# Altium PCB PCB_Hackathon.PcbDoc
Units mm, origin at the board's own origin, x right, y up, seen from the top; angles counter-clockwise.
Board outline 30 x 41 mm, 2 copper layers (Top Layer, Bottom Layer); 33 components, 23 nets, 159 pads, 38 vias.
Unrouted connection lines stored in the file: 1.
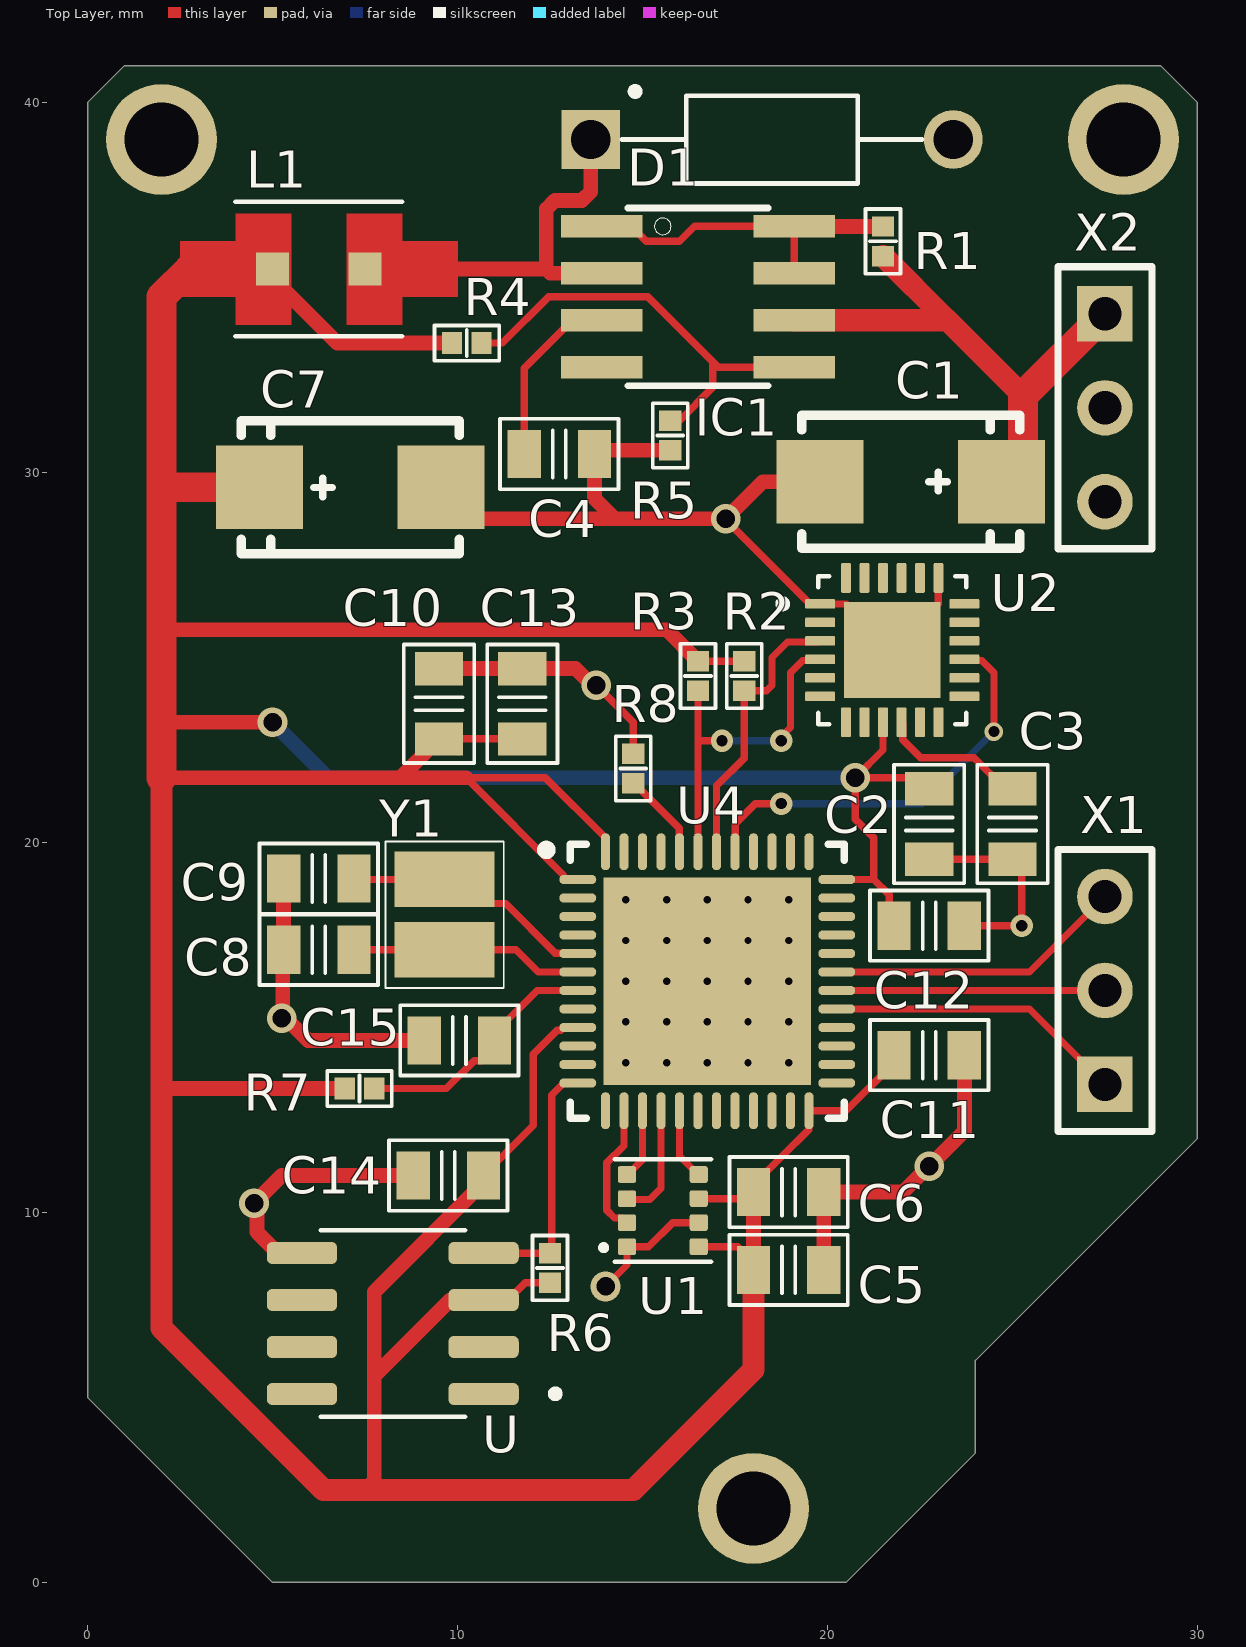
[diagram p0: Top Layer view]
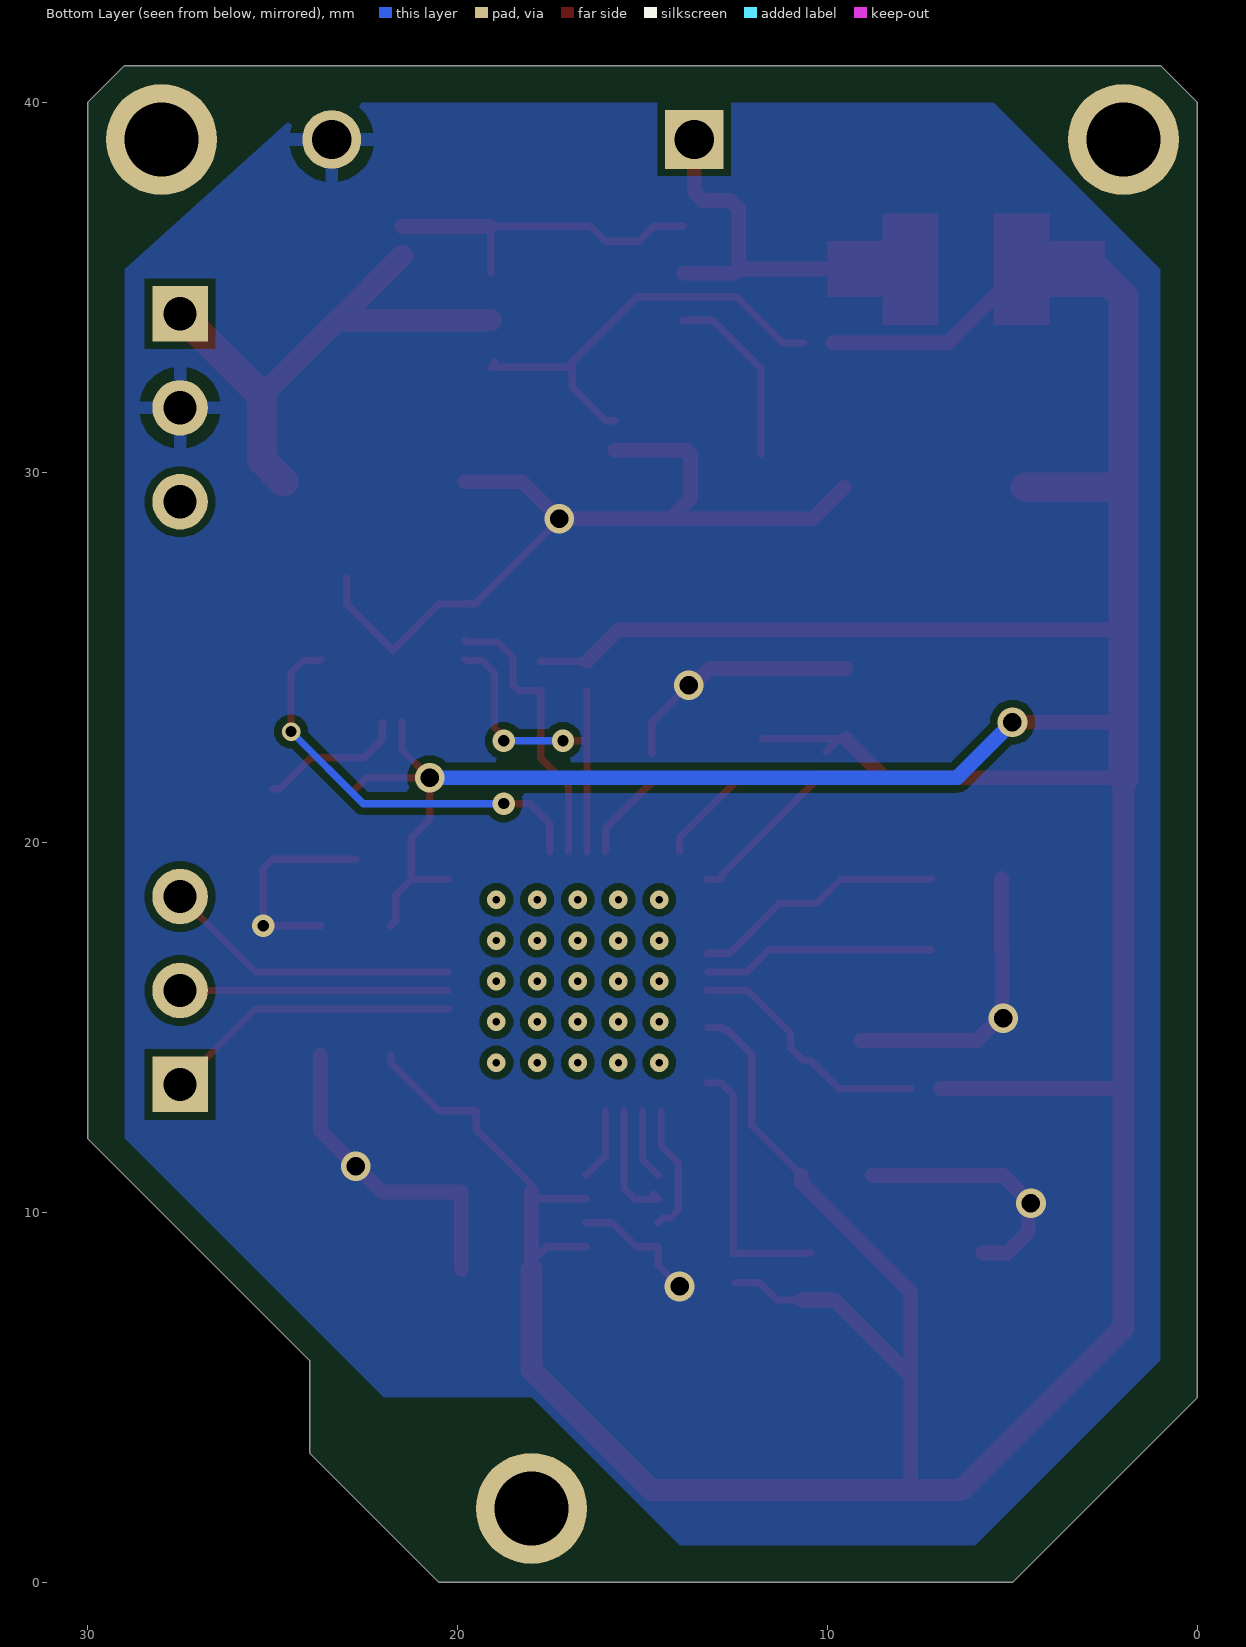
[diagram p1: Bottom Layer view, seen from below]

## Layer stack, top to bottom
Top Solder: solder mask 0.0102, Solder Resist, Dk 3.5
Top Layer: signal copper 0.0356
Dielectric 1: dielectric 0.32, FR-4, Dk 4.8
Bottom Layer: signal copper 0.0356
Bottom Solder: solder mask 0.0102, Solder Resist, Dk 3.5

## Board outline
5,0 0,5 0,40 1,41 29,41 30,40 30,12 24,6 24,3.5 20.5,0

## Design rules (kind name [scope] priority, off if disabled: settings)
AcuteAngle [All] p1: minimum=3.50000000000000E+0001 checktracksonly=FALSE
BoardOutlineClearance "BoardOutlineClearance 1" [All] p1: gap=0.25 ignorepadtopadclearanceinfootprint=FALSE except(0: Arc-SplitContinuation Track-SplitContinuation SMDPad-SplitContinuation THPad-SplitContinuation Via-SplitContinuation Fill-SplitContinuation Poly-SplitContinuation Region-SplitContinuation Text-SplitContinuation) // Milling
BoardOutlineClearance "BoardOutlineClearance 2" [All] p2: gap=0.4 ignorepadtopadclearanceinfootprint=FALSE except(0: Arc-SplitContinuation Track-SplitContinuation SMDPad-SplitContinuation THPad-SplitContinuation Via-SplitContinuation Fill-SplitContinuation Poly-SplitContinuation Region-SplitContinuation Text-SplitContinuation) // V-Cut
Clearance "Clearance 3 Oz" [All] p1 off: gap=0.35 ignorepadtopadclearanceinfootprint=FALSE except(0.25: Arc-Hole Track-Hole SMDPad-Hole THPad-Hole Via-Hole Fill-Hole Poly-Hole Region-Hole Text-Hole)
Clearance "Clearance 2 Oz" [All] p2 off: gap=0.3 ignorepadtopadclearanceinfootprint=FALSE except(0.25: Arc-Hole Track-Hole SMDPad-Hole THPad-Hole Via-Hole Fill-Hole Poly-Hole Region-Hole Text-Hole)
Clearance "Clearance-1 1 Oz" [All] p3: gap=0.2 ignorepadtopadclearanceinfootprint=FALSE except(0.25: Arc-Hole Track-Hole SMDPad-Hole THPad-Hole Via-Hole Fill-Hole Poly-Hole Region-Hole Text-Hole) // Standart
Clearance "Clearance-2 1 Oz" [All] p4 off: gap=0.15 ignorepadtopadclearanceinfootprint=FALSE except(0.2: Arc-Fill Arc-Poly Track-Fill Track-Poly SMDPad-Fill SMDPad-Poly THPad-Fill THPad-Poly Via-Fill Via-Poly Fill-Fill Fill-Poly Poly-Poly; 0.25: Arc-Hole Track-Hole SMDPad-Hole THPad-Hole Via-Hole Fill-Hole Poly-Hole Region-Hole Text-Hole) // Advance
Clearance "Clearance-1 1/2 Oz" [All] p5 off: gap=0.125 ignorepadtopadclearanceinfootprint=FALSE except(0.2: Arc-Fill Arc-Poly Track-Fill Track-Poly SMDPad-SMDPad SMDPad-Fill SMDPad-Poly THPad-Fill THPad-Poly Via-Fill Via-Poly Fill-Fill Fill-Poly Poly-Poly Poly-Region Poly-Text; 0.25: Arc-Hole Track-Hole SMDPad-Hole THPad-Hole Via-Hole Fill-Hole Poly-Hole Region-Hole Text-Hole) // Standart
Clearance "Clearance-2 1/2 Oz" [All] p6 off: gap=0.1 ignorepadtopadclearanceinfootprint=FALSE except(0.15: Arc-Fill Arc-Poly Track-Fill Track-Poly SMDPad-SMDPad SMDPad-Fill SMDPad-Poly THPad-Fill THPad-Poly Via-Fill Via-Poly Fill-Fill Fill-Poly Poly-Poly Poly-Region Poly-Text; 0.25: Arc-Hole Track-Hole SMDPad-Hole THPad-Hole Via-Hole Fill-Hole Poly-Hole Region-Hole Text-Hole) // Advance
DiffPairsRouting "DiffPairsRouting 1 Oz" [All] p1: maxlimit=0.254 minlimit=0.2 mostfreqgap=0.254 toplayer_minwidth=0.2 toplayer_maxwidth=0.381 toplayer_prefwidth=0.381 bottomlayer_minwidth=0.2 bottomlayer_maxwidth=0.381 bottomlayer_prefwidth=0.381 maxuncoupledlength=12.7
DiffPairsRouting "DiffPairsRouting 1/2 Oz" [All] p2: maxlimit=0.254 minlimit=0.1 mostfreqgap=0.254 toplayer_minwidth=0.1 toplayer_maxwidth=0.381 toplayer_prefwidth=0.381 bottomlayer_minwidth=0.1 bottomlayer_maxwidth=0.381 bottomlayer_prefwidth=0.381 maxuncoupledlength=12.7
HoleSize "Minimum HoleSize" [IsPad] p1: absolutevalues=TRUE maxlimit=5.9 minlimit=0.6 maxpercent=80.000 minpercent=20.000
HoleSize "Minimum HoleSize VIA 1" [IsVia] p2: absolutevalues=TRUE maxlimit=5.9 minlimit=0.3 maxpercent=80.000 minpercent=20.000 // Standart
HoleSize "Minimum HoleSize VIA 2" [IsVia] p3: absolutevalues=TRUE maxlimit=5.9 minlimit=0.2 maxpercent=80.000 minpercent=20.000 // Advance
HoleToHoleClearance Hole2HoleClearance [All] p1: gap=0.25 allowstackedmicrovias=FALSE
MinimumAnnularRing "Minimum AR VIA Standart" [IsVia] p1: minimumring=0.15
MinimumAnnularRing "Minimum AR PAD Standart" [IsPAD] p2: minimumring=0.2
MinimumAnnularRing "Minimum AR VIA Advance" [IsVia] p3: minimumring=0.1
MinimumAnnularRing "Minimum AR PAD Advance" [IsPAD] p4: minimumring=0.15
MinimumSolderMaskSliver "SolderMask Bridge Standart" [All] p1: minsoldermaskwidth=0.15 // All Masks
MinimumSolderMaskSliver "SolderMask Bridge Advance" [All] p2: minsoldermaskwidth=0.1 // Mask LDI
PlaneClearance "PlaneClearance 3 Oz" [All] p1: clearance=0.35
PlaneClearance "PlaneClearance 2 Oz" [All] p2: clearance=0.3
PlaneClearance "PlaneClearance 1 Oz" [All] p3: clearance=0.2
PlaneClearance "PlaneClearance-1 1/2 Oz" [All] p4: clearance=0.2 // Standart
PlaneClearance "PlaneClearance-2 1/2 Oz" [All] p5: clearance=0.15 // Advance
PlaneConnect "TermalConnect 3 Oz" [All] p1: planeconnectstyle=Relief reliefexpansion=0.2 reliefentries=4 reliefconductorwidth=0.35 reliefairgap=0.35 // Standart
PlaneConnect "TermalConnect 2 Oz" [All] p2: planeconnectstyle=Relief reliefexpansion=0.2 reliefentries=4 reliefconductorwidth=0.3 reliefairgap=0.3 // Standart
PlaneConnect "TermalConnect-1 1 Oz" [All] p3: planeconnectstyle=Relief reliefexpansion=0.2 reliefentries=4 reliefconductorwidth=0.2 reliefairgap=0.2 // Standart
PlaneConnect "TermalConnect-2 1 Oz" [All] p4: pad.planeconnectstyle=Relief pad.reliefexpansion=0.15 pad.reliefentries=4 pad.reliefconductorwidth=0.2 pad.reliefairgap=0.2 via.planeconnectstyle=Direct via.reliefexpansion=0.15 via.reliefentries=4 via.reliefconductorwidth=0.15 via.reliefairgap=0.15 // Advance
PlaneConnect "TermalConnect-1 1/2 Oz" [All] p5: planeconnectstyle=Relief reliefexpansion=0.2 reliefentries=4 reliefconductorwidth=0.2 reliefairgap=0.2 // Standart
PlaneConnect "TermalConnect-2 1/2 Oz" [All] p6: pad.planeconnectstyle=Relief pad.reliefexpansion=0.15 pad.reliefentries=4 pad.reliefconductorwidth=0.15 pad.reliefairgap=0.15 via.planeconnectstyle=Direct via.reliefexpansion=0.15 via.reliefentries=4 via.reliefconductorwidth=0.15 via.reliefairgap=0.15 // Advance
PolygonConnect "PolygonConnect 3 Oz" [All] p1: thpad.connectstyle=Relief thpad.reliefconductorwidth=0.35 thpad.reliefentries=4 thpad.polygonreliefangle="90 Angle" thpad.airgapwidth=0.35 smdpad.connectstyle=Relief smdpad.reliefconductorwidth=0.35 smdpad.reliefentries=4 smdpad.polygonreliefangle="90 Angle" smdpad.airgapwidth=0.35 via.connectstyle=Direct via.reliefconductorwidth=0.254 via.reliefentries=4 via.polygonreliefangle="90 Angle" via.airgapwidth=0.254
PolygonConnect "PolygonConnect 2 Oz" [All] p2: thpad.connectstyle=Relief thpad.reliefconductorwidth=0.3 thpad.reliefentries=4 thpad.polygonreliefangle="90 Angle" thpad.airgapwidth=0.3 smdpad.connectstyle=Relief smdpad.reliefconductorwidth=0.3 smdpad.reliefentries=4 smdpad.polygonreliefangle="90 Angle" smdpad.airgapwidth=0.3 via.connectstyle=Direct via.reliefconductorwidth=0.254 via.reliefentries=4 via.polygonreliefangle="90 Angle" via.airgapwidth=0.254
PolygonConnect "PolygonConnect-1 1 Oz" [All] p3: thpad.connectstyle=Relief thpad.reliefconductorwidth=0.2 thpad.reliefentries=4 thpad.polygonreliefangle="90 Angle" thpad.airgapwidth=0.2 smdpad.connectstyle=Relief smdpad.reliefconductorwidth=0.2 smdpad.reliefentries=4 smdpad.polygonreliefangle="90 Angle" smdpad.airgapwidth=0.2 via.connectstyle=Direct via.reliefconductorwidth=0.254 via.reliefentries=4 via.polygonreliefangle="90 Angle" via.airgapwidth=0.254 // Standart
PolygonConnect "PolygonConnect-2 1 Oz" [All] p4: thpad.connectstyle=Relief thpad.reliefconductorwidth=0.15 thpad.reliefentries=4 thpad.polygonreliefangle="90 Angle" thpad.airgapwidth=0.15 smdpad.connectstyle=Relief smdpad.reliefconductorwidth=0.15 smdpad.reliefentries=4 smdpad.polygonreliefangle="90 Angle" smdpad.airgapwidth=0.15 via.connectstyle=Direct via.reliefconductorwidth=0.254 via.reliefentries=4 via.polygonreliefangle="90 Angle" via.airgapwidth=0.254 // Advance
PolygonConnect "PolygonConnect-1 1/2 Oz" [All] p5: thpad.connectstyle=Relief thpad.reliefconductorwidth=0.15 thpad.reliefentries=4 thpad.polygonreliefangle="90 Angle" thpad.airgapwidth=0.2 smdpad.connectstyle=Relief smdpad.reliefconductorwidth=0.2 smdpad.reliefentries=4 smdpad.polygonreliefangle="90 Angle" smdpad.airgapwidth=0.2 via.connectstyle=Direct via.reliefconductorwidth=0.254 via.reliefentries=4 via.polygonreliefangle="90 Angle" via.airgapwidth=0.254 // Standart
PolygonConnect "PolygonConnect-2 1/2 Oz" [All] p6: thpad.connectstyle=Relief thpad.reliefconductorwidth=0.125 thpad.reliefentries=4 thpad.polygonreliefangle="90 Angle" thpad.airgapwidth=0.15 smdpad.connectstyle=Relief smdpad.reliefconductorwidth=0.125 smdpad.reliefentries=4 smdpad.polygonreliefangle="90 Angle" smdpad.airgapwidth=0.15 via.connectstyle=Direct via.reliefconductorwidth=0.254 via.reliefentries=4 via.polygonreliefangle="90 Angle" via.airgapwidth=0.254 // Advance
RoutingCorners [All] p1 off: cornerstyle=45-Degree minsetback=2.54 maxsetback=2.54
RoutingVias [All] p1: holewidth=0.3 width=0.6 viastyle="Through Hole" minholewidth=0.2 minwidth=0.4 maxholewidth=5.9 maxwidth=6.4
SilkToSilkClearance Silk2SilkClearance [All] p1 off: silktosilkclearance=0.15
SilkToSolderMaskClearance Silk2SolderMaskClearance [IsPad] p1 off: minsilkscreentomaskgap=0.15 clearancetoexposedcopper=TRUE
SolderMaskExpansion SolderMaskExpansion-1 [All] p1: expansion=0.05 istentingtop=FALSE // Standart
SolderMaskExpansion "SolderMaskExpansion LDI" [All] p2 off: expansion=0.025 istentingtop=FALSE // Advance
UnRoutedNet [All] p1: checkbadconnections=TRUE
Width "Width 1 Oz" [All] p1: maxlimit=10 minlimit=0.15 preferedwidth=0.2 checkconnectedcopper=TRUE
Width "Width 3 Oz" [All] p2: maxlimit=10 minlimit=0.35 preferedwidth=0.4 checkconnectedcopper=TRUE
Width "Width 2 Oz" [All] p3 off: maxlimit=10 minlimit=0.3 preferedwidth=0.35 minimp=50.000000 maximp=50.000000 favimp=50.000000 checkconnectedcopper=TRUE
Width "Width 1/2 Oz" [All] p4 off: maxlimit=10 minlimit=0.1 preferedwidth=0.125 checkconnectedcopper=TRUE
20 further rules are at their usual default settings.

## Classes and differential pairs
component class Sheet1: X2
component class STM32-sheet: C8 C9 C10 C11 C12 C13 C14 C15 R7 Y1
component class Modules-sheet: C1 C2 C3 C4 C5 C6 C7 D1 IC1 L1 R3 R4 R5 R6 U U1 U2 X1

## Components (designator, comment, footprint, x,y, rotation, side; value= is the part's Value field where it differs from the comment)
C1 "100uF" CPM6032 22.25,29.75 r180 top
C2 "0.1uF" C_0805 22.75,20.5 r90 top
C3 "4.7uF" C_0805 25,20.5 r90 top
C4 "470pF" C_0805 12.75,30.5 r180 top
C5 "100nF" C_0805 18.95,8.45 r180 top
C6 "100nF" C_0805 18.95,10.55 r180 top
C7 "470uF" CPM6032 7.1,29.6 r0 top
C8 "8 pF" C_0805 6.25,17.1 r180 top
C9 "8 pF" C_0805 6.25,19.025 r0 top
C10 "0.1uF" C_0805 9.5,23.75 r90 top
C11 "0.1uF" C_0805 22.75,14.25 r0 top
C12 "0.1uF" C_0805 22.75,17.75 r0 top
C13 "0.1uF" C_0805 11.75,23.75 r90 top
C14 "0.1uF" C_0805 9.75,11 r180 top
C15 "0.1uF" C_0805 10.05,14.65 r0 top
D1 "BYV10-40" BYV10-40 18.5,39 r0 top
IC1 "MC34063A" SO08 16.5,34.75 r270 top
L1 "LQH43C" IND_LQH43CN2R2M03L 6.25,35.5 r180 top
R1 "0.33 Ohm" R_0402 21.5,36.25 r90 top
R2 "10K" R_0402 17.75,24.5 r90 top
R3 "10K" R_0402 16.5,24.5 r90 top
R4 "3K6" R_0402 10.25,33.5 r180 top
R5 "1K2" R_0402 15.75,31 r90 top
R6 "4K7" R_0402 12.5,8.5 r90 top
R7 "10K" R_0402 7.35,13.35 r180 top
R8 "10K" R_0402 14.75,22 r90 top
U "DS18B20Z" SOIC127P600X175-8N 8.25,7 r180 top
U1 "BME280" PSON65P250X250X100-8N 15.55,10.05 r180 top
U2 "TH02" QFN-24 21.75,25.2 r0 top
U4 "STM32F103CBU6" STM-UFQFPN48_M 16.75,16.25 r0 top
X1 "PLS-3" PLS-3-3D 27.5,13.46 r90 top
X2 "PLS-3" PLS-3-3D 27.5,34.29 r270 top
Y1 "" NX3225GD 9.65,18.05 r0 top

## Footprints (in the part's own frame and the unit in brackets; to place one, negate y for a bottom-side part, rotate by r counter-clockwise, add the part's x,y. Pads: shape width x height; smd on the part's side, far side on the other; paste and mask are expansions set on the pad)
BYV10-40 [mm]
  rect 1.59x1.59 / inner round 1.59 / far side rect 1.59x1.59 hole 1.06: 1(-4.9,0)
  round 1.59 hole 1.06: 2(4.9,0)
  silkscreen extent -4.07,-1.19 4.07,1.4, body extent -5.29,-1.36 5.29,1.36, height 2.72
C_0805 [mm] "Capacitor Pattern"
  rect 0.9x1.3 smd: 1(-0.95,0) 2(0.95,0)
  silkscreen extent -1.6,-0.95 1.6,0.95, body extent -1,-0.63 1,0.62, height 0.6
CPM6032 [mm]
  rect 2.35x2.25 smd: 1(2.45,0) 2(-2.45,0)
  silkscreen extent -2.95,-1.8 2.95,1.8, body extent -3,-1.6 3,1.6, height 2.51
IND_LQH43CN2R2M03L [mm]
  rect 0.9x0.9 smd paste-1 mask+0: 1(-1.25,0) 2(1.25,0)
  Top Layer region: -0.75,-1.5 -2.25,-1.5 -2.25,-0.75 -3.75,-0.75 -3.75,0.75 -2.25,0.75 -2.25,1.5 -0.75,1.5
  Top Layer region: 2.25,0.75 3.75,0.75 3.75,-0.75 2.25,-0.75 2.25,-1.5 0.75,-1.5 0.75,1.5 2.25,1.5
  silkscreen extent -2.25,-1.82 2.25,1.82, body extent -2.25,-1.6 2.25,1.6, height 2.8
NX3225GD [mm]
  rect 2.7x1.5 smd: 1(0,-0.95) 2(0,0.95)
  silkscreen extent -1.6,-1.98 1.6,1.98, body extent -1.25,-1.6 1.25,1.6, height 1
PLS-3-3D [mm] "Connector; Header; 3 Position"
  rect 1.5x1.5 hole 0.9: 1(0,0)
  round 1.5 hole 0.9: 2(2.54,0) 3(5.08,0)
  silkscreen extent -1.27,-1.27 6.35,1.27, body extent -1.27,-1.27 6.35,1.27, height 8.44
PSON65P250X250X100-8N [mm]
  rrect25% 0.49x0.45 smd: 1(0.97,0.975) 2(0.97,0.325) 3(0.97,-0.325) 4(0.97,-0.975) 5(-0.97,-0.975) 6(-0.97,-0.325) 7(-0.97,0.325) 8(-0.97,0.975)
  silkscreen extent -1.3,-1.39 1.65,1.39, body extent -1.25,-1.25 1.25,1.25, height 1
QFN-24 [mm]
  rrect25% 0.81x0.26 smd: 1(-1.95,1.25) 2(-1.95,0.75) 3(-1.95,0.25) 4(-1.95,-0.25) 5(-1.95,-0.75) 6(-1.95,-1.25) 13(1.95,-1.25) 14(1.95,-0.75) 15(1.95,-0.25) 16(1.95,0.25) 17(1.95,0.75) 18(1.95,1.25)
  rrect25% 0.26x0.81 smd: 7(-1.25,-1.95) 8(-0.75,-1.95) 9(-0.25,-1.95) 10(0.25,-1.95) 11(0.75,-1.95) 12(1.25,-1.95) 19(1.25,1.95) 20(0.75,1.95) 21(0.25,1.95) 22(-0.25,1.95) 23(-0.75,1.95) 24(-1.25,1.95)
  rect 2.6x2.6 smd paste-2: 25(0,0)
  silkscreen extent -3.06,-2 2,2, body extent -2,-2 2,2, height 0.95
R_0402 [mm]
  rect 0.55x0.6 smd: 1(-0.4,0) 2(0.4,0)
  silkscreen extent -0.87,-0.48 0.87,0.48, body extent -0.52,-0.3 0.52,0.3, height 0.34
SO08 [mm]
  rect 0.6x2.2 smd: 1(-1.905,-2.6) 2(-0.635,-2.6) 3(0.635,-2.6) 4(1.905,-2.6) 5(1.905,2.6) 6(0.635,2.6) 7(-0.635,2.6) 8(-1.905,2.6)
  silkscreen extent -2.4,-1.9 2.4,1.9, body extent -2.45,-3 2.45,3, height 1.75
SOIC127P600X175-8N [mm]
  rrect50% 1.9x0.6 smd: 1(-2.455,1.905) 2(-2.455,0.635) 3(-2.455,-0.635) 4(-2.455,-1.905) 5(2.455,-1.905) 6(2.455,-0.635) 7(2.455,0.635) 8(2.455,1.905)
  silkscreen extent -4.49,-2.52 1.95,2.52, body extent -3,-2.45 3,2.45, height 1.75
STM-UFQFPN48_M [mm] "QFN, 48-Leads, Body 7.1x7.1mm, Pitch 0.5mm, Thermal Pad 5.6x5.6mm, IPC Low Density"
  oval 1x0.25 smd mask+0.07: 1(-3.5,2.75) 2(-3.5,2.25) 3(-3.5,1.75) 4(-3.5,1.25) 5(-3.5,0.75) 6(-3.5,0.25) 7(-3.5,-0.25) 8(-3.5,-0.75) 9(-3.5,-1.25) 10(-3.5,-1.75) 11(-3.5,-2.25) 12(-3.5,-2.75) 25(3.5,-2.75) 26(3.5,-2.25) 27(3.5,-1.75) 28(3.5,-1.25) 29(3.5,-0.75) 30(3.5,-0.25) 31(3.5,0.25) 32(3.5,0.75) 33(3.5,1.25) 34(3.5,1.75) 35(3.5,2.25) 36(3.5,2.75)
  oval 0.25x1 smd mask+0.07: 13(-2.75,-3.5) 14(-2.25,-3.5) 15(-1.75,-3.5) 16(-1.25,-3.5) 17(-0.75,-3.5) 18(-0.25,-3.5) 19(0.25,-3.5) 20(0.75,-3.5) 21(1.25,-3.5) 22(1.75,-3.5) 23(2.25,-3.5) 24(2.75,-3.5) 37(2.75,3.5) 38(2.25,3.5) 39(1.75,3.5) 40(1.25,3.5) 41(0.75,3.5) 42(0.25,3.5) 43(-0.25,3.5) 44(-0.75,3.5) 45(-1.25,3.5) 46(-1.75,3.5) 47(-2.25,3.5) 48(-2.75,3.5)
  rect 5.6x5.6 smd mask+0.07: 49(0,0)
  silkscreen extent -4.47,-3.7 3.7,3.7, body extent -3.51,-3.52 3.51,3.5, height 0.78

## Part data
C1 C7: library part CPM6032, "Capacitor"
C2 C3 C4 C5 C6 C8 C9 C10 C11 C12 C13 C14 C15: library part C0805, "Capacitor"
D1: "Diode Schottky"
IC1: "Buck, Boost Switching Regulator IC Positive or Negative Adjustable 1.25V 1 Output 1.5A _Switch_ 8-SOIC _0.154, 3.90mm Width_", Package="SOIC-8 Texas Instruments", Availability=Unavailable, MF="Texas Instruments", MP=MC34063A, Price=None, SnapEDA_Link=https://www.snapeda.com/parts/MC34063A/Texas%20Instruments/view-part/581314/?ref=snap
L1: "Inductor with Inductance: 2.2uH Tol. +/-20%, Package: 1812 (4532)", Package=NONSTANDARD, Availability=Good, MF=Murata, MP=LQH43CN2R2M03L, Price=None, Purchase-URL=https://pricing.snapeda.com/search/part/LQH43CN2R2M03L/?ref=eda, SnapEDA_Link=https://www.snapeda.com/parts/LQH43CN2R2M03L/Murata/view-part/4550537/?ref=snap
R1 R2 R3 R4 R5 R6 R7 R8: library part R0402, "Resistor"
U: "Temperature Sensor Digital, Local -55Â°C ~ 125Â°C 12 b 8-SOIC", Package="SOIC-8 Maxim", Availability=Unavailable, MF="Maxim Integrated", MP=DS18B20Z+, Price=None, SnapEDA_Link=https://www.snapeda.com/parts/DS18B20Z%2B/Maxim%20Integrated/view-part/109391/?ref=snap
U1: "DIGITAL HUMIDITY, PRESSURE AND TEMPERATURE SENSOR<br>* Digital interface IÂ²C (up to 3.4 MHz) and SPI (3 and 4 wire, up to 10 MHz)* Supply voltage VDD main supply voltage range: 1.71 V to 3.6 V*VDDIO interface voltage range: 1.2 V to 3.6 V<br> Operating range -40â€", Package=None, Availability=Unavailable, MP=BME280, Price=None
U4: "STM32 ARM-based 32-bit MCU Performance Line with 128 kB Flash, 20 kB Internal RAM, -40 to +85°C Temperature, 48-Pin VFQFPN, Tray", ComponentLink1Description="Manufacturer URL", ComponentLink1URL=http://www.st.com/, ComponentLink2Description="STM32F103 Datasheet", ComponentLink2URL=http://www.st.com/internet/com/TECHNICAL_RESOURCES/TECHNICAL_LITERATURE/DATASHEET/CD00161566.pdf, ComponentLink3Description="STM32 Family Web Page", ComponentLink3URL=www.st.com/stm32, DatasheetVersion="rev13.0, Apr-2011", PackageDescription="48-Pin Quad Flat No-Lead, 7 x 7 x 0.9 mm Body, 0.5 mm Pitch, Exposed Pad", PackageReference=VFQFPN48, PackageVersion=2011
X1 X2: "Header, 3-Pin", LatestRevisionDate=17-Jul-2002, LatestRevisionNote="Re-released for DXP Platform.", Publisher="Altium Limited"
Y1: library part NX3225GD, "Crystal Oscillator"

## Free pads (board coordinates)
  round 3 hole 2: 2(2,39) 2(18,2) 2(28,39)

## Via types
v1: diameter 0.5, hole 0.2, Top Layer to Bottom Layer, 25 vias
v2: diameter 0.8, hole 0.5, Top Layer to Bottom Layer, 8 vias
v3: diameter 0.6, hole 0.3, Top Layer to Bottom Layer, 4 vias
v4: diameter 0.5, hole 0.3, Top Layer to Bottom Layer, 1 vias

## Nets (pads, with @x,y where several pads share a name; then routed paths per layer and width w, separated by ;. In a path a pad name is that pad's centre, name@x,y a point inside that pad or via, vN(x,y) a via of type N, cw(c..) or ccw(c..) an arc to the next point about the centre after c; other vN are vias at no path point)
3V3-SYS: C2.2 C5.2 C6.2 C7.2 C10.1 C11.1 C12.1 C13.1 C14.1 L1.2 R2.2 R3.2 R4.2 R6.1 R7.2 U1.6 U1.8 U2.9 U4.1 U4.9 U4.24 U4.36 U4.48 U.3 | length 164.9
  Top Layer w0.2: C10.1@9.475,22.775 9.712,22.775 C10.1@10.037,22.45 ; C10.1 C13.1 ; C14.1 12.05,12.35 12.05,14.276 12.699,14.925 12.786,14.925 12.861,15 U4.9 ; U.3 11.361,7.635 11.826,8.1 R6.1 ; U4.1 12.889,19 12.865,19.023 12.865,19.12 10.235,21.75 12.375,21.75 14,20.125 U4.48 ; R3.2 R2.2 ; U1.8 17.575,9.075 C5.2@18,8.65 ; U1.6 17.825,10.375 C6.2 18,10.75 18.75,11.5 19.49,12.24 19.49,12.74 U4.24 20.5,12.75 21.8,14.05 C11.1 ; U4.36 21.25,19 ; U2.9 21.5,22.5 v2(20.75,21.75) ; C12.1 21.667,17.883 21.667,18.583 21.25,19 ; C2.2 22.45,21.75 v2(20.75,21.75) ; v2(20.75,21.75) 20.75,20.625 21.25,20.125 21.25,19
  Top Layer w0.4: 2,13.35 R7.2 ; 2,21.75 8.45,21.75 ; 2,23.25 v2(5,23.25) ; 2,25.75 15.65,25.75 R3.2 ; L1.2@5,35.25 6.75,33.5 R4.2 ; 7.5,2.5 7.75,2.75 7.75,5.58 ; C10.1 9.475,22.775 8.45,21.75 ; 10.235,21.75 8.45,21.75 ; C14.1 10.7,10.8 7.75,7.85 7.75,5.58 ; U.3 9.805,7.635 7.75,5.58 ; C5.2 18,8.65 C6.2
  Top Layer w0.6: 2,21.75 2,13.35 2,6.879 6.379,2.5 7.5,2.5 14.75,2.5 18,5.75 C5.2
  Top Layer w0.8: 2,21.75 2,23.25 2,25.75 2,29.5 ; C7.2 2.1,29.6 2,29.5 ; L1.2 2.75,35.5 2,34.75 2,29.5
  Bottom Layer w0.4: v2(5,23.25) 6.5,21.75 v2(20.75,21.75)
12V-PWR: C1.2 IC1.6 R1.1 X2.1 | length 15.2
  Top Layer w0.6: IC1.6 23.235,34.115 ; R1.1 23.235,34.115 ; 25.285,32.075 23.245,34.115 23.235,34.115
  Top Layer w0.8: C1.2 25.285,30.335 25.285,32.075 X2.1
GND: C1.1 C2.1 C3.1 C4.1 C5.1 C6.1 C7.1 C8.2 C9.1 C10.2 C11.2 C12.2 C13.2 C14.2 C15.1 D1.2 IC1.4 R5.1 R8.2 U1.1 U1.7 U2.1 U2.19 U2.25 U.5 X2.2 | length 62.9
  Top Layer w0.2: v2(13.75,24.25) 14.75,23.25 R8.2 ; v2(14,8) 14.58,8.58 U1.1 15.162,9.075 15.812,9.725 U1.7 ; v2(17.25,28.75) 17.25,28.725 19.525,26.45 U2.1 19.805,26.445 20.505,26.445 U2.25 22.995,26.445 22.995,27.145 U2.19 ; C2.1 C3.1 25.25,19.3 v3(25.25,17.75) C12.2
  Top Layer w0.4: C9.1 C8.2 5.275,17.075 5.275,15.275 v2(5.25,15.25) 5.358,15.25 5.958,14.65 C15.1 ; U.5 5.145,8.905 4.577,9.473 4.577,10.173 v2(4.5,10.25) 5.25,11 C14.2 ; C10.2 C13.2 13.192,24.7 13.642,24.25 v2(13.75,24.25) ; C7.1 10.4,28.75 14.25,28.75 ; R5.1 13.8,30.6 C4.1 13.7,29.3 14.25,28.75 ; C1.1 18.25,29.75 v2(17.25,28.75) 14.25,28.75 ; C5.1 C6.1 22.036,10.55 22.736,11.25 v2(22.75,11.25) 23.7,12.2 C11.2
I2C_CS: U2.15 U4.41 | length 11.3
  Top Layer w0.2: U4.41 17.51,19.76 17.51,20.51 18.05,21.05 v3(18.75,21.05) ; U2.15 23.73,24.92 24.17,24.92 24.5,24.59 v4(24.5,23)
  Bottom Layer w0.2: v3(18.75,21.05) 22.55,21.05 v4(24.5,23)
I2C_SCL: R2.1 U2.3 U4.42 | length 7.7
  Top Layer w0.2: U4.42 17,21.532 17.75,22.282 R2.1 18.35,24.1 18.5,24.25 18.5,25 18.92,25.42 19.77,25.42 U2.3
I2C_SDA: R3.1 U2.4 U4.43 | length 9.5
  Top Layer w0.2: U4.43 16.5,22.75 ; R3.1 16.5,22.75 ; v3(17.15,22.75) 16.5,22.75 ; v3(18.75,22.75) 18.75,22.858 19,23.108 19,24.59 19.33,24.92 19.77,24.92 U2.4
  Bottom Layer w0.2: v3(17.15,22.75) v3(18.75,22.75)
NetC3_2: C3.2 U2.10 | length 4
  Top Layer w0.2: U2.10 22.03,23.22 22.03,22.78 22.52,22.29 23.96,22.29 24.8,21.45 C3.2
NetC4_2: C4.2 IC1.3 | length 5
  Top Layer w0.2: C4.2 11.8,32.815 13.1,34.115 IC1.3
NetC8_1: C8.1 U4.6 Y1.1 | length 6.3
  Top Layer w0.2: C8.1 Y1.1 11.581,17.1 12.181,16.5 13.231,16.5 U4.6@13.24,16.49
NetC9_2: C9.2 U4.5 Y1.2 | length 6.9
  Top Layer w0.2: C9.2 7.225,19 Y1.2 10.3,18.35 11.3,18.35 12.641,17.01 13.24,17.01 U4.5
NetC15_2: C15.2 R7.1 U4.7 | length 6.8
  Top Layer w0.2: R7.1 9.7,13.35 10.45,14.1 10.65,14.1 11,14.45 C15.2 11,14.85 12.15,16 U4.7 U4.7@13.24,15.99
NetD1_1: D1.1 IC1.2 L1.1 | length 10.9
  Top Layer w0.4: L1.1 12.4,35.5 ; D1.1 13.6,37.589 13.366,37.355 12.634,37.355 12.4,37.121 12.4,35.5 ; IC1.2 12.515,35.385 12.4,35.5
NetIC1_1: IC1.1 IC1.7 IC1.8 R1.2 | length 9.2
  Top Layer w0.2: IC1.1 14.7,36.655 15.105,36.25 16,36.25 16.405,36.655 IC1.8 ; IC1.7 IC1.8 ; IC1.8@19.105,36.65 IC1.8
  Top Layer w0.4: IC1.8@19.105,36.65 R1.2
NetIC1_5: IC1.5 R4.1 R5.2 | length 12
  Top Layer w0.2: R4.1 11.211,33.5 12.461,34.75 15.139,34.75 16.9,32.989 ; R5.2 16,31.4 16.9,32.3 16.9,32.989 ; IC1.5 17.044,32.845 16.9,32.989
NetR8_1: R8.1 U4.44 | length 2.8
  Top Layer w0.2: R8.1 14.775,21.6 15.99,20.385 15.99,19.76 U4.44 U4.44@16,20.139
SPI1_CSB: U1.2 U4.14 | length 3.6
  Top Layer w0.2: U4.14 14.5,11.806 14.035,11.341 14.035,10.059 14.244,9.85 14.455,9.85 U1.2
SPI1_MISO: U1.3 U4.16 | length 3.3
  Top Layer w0.2: U1.3@14.705,10.5 U1.3 14.605,10.35 15.2,10.35 15.5,10.65 U4.16
SPI1_MOSI: U1.5 U4.17 | length 2
  Top Layer w0.2: U4.17 16,11.525 16.5,11.025 U1.5
SPI1_SCK: U1.4 U4.15 | length 1.9
  Top Layer w0.2: U1.4 14.6,11.025 15,11.425 U4.15
USART1_CK: U4.29 X1.1 | length 8.1
  Top Layer w0.2: U4.29 25.46,15.5 X1.1
USART1_RX: U4.31 X1.3 | length 8.1
  Top Layer w0.2: U4.31 25.46,16.5 X1.3
USART1_TX: U4.30 X1.2 | length 7.3
  Top Layer w0.2: U4.30 X1.2
USART2_TX: R6.2 U4.12 U.4 | length 7.2
  Top Layer w0.2: U.4@10.455,8.905 U.4 10.707,8.903 12.497,8.903 R6.2 ; R6.2@12.55,8.9 12.55,13.175 12.875,13.5 U4.12
pads on no net: U2.2 U2.5 U2.6 U2.7 U2.8 U2.11 U2.12 U2.13 U2.14 U2.16 U2.17 U2.18 U2.20 U2.21 U2.22 U2.23 U2.24 U4.2 U4.3 U4.4 U4.8 U4.10 U4.11 U4.13 U4.18 U4.19 U4.20 U4.21 U4.22 U4.23 U4.25 U4.26 U4.27 U4.28 U4.32 U4.33 U4.34 U4.35 U4.37 U4.38 U4.39 U4.40 U4.45 U4.46 U4.47 U4.49 U.1 U.2 U.6 U.7 U.8 X2.3
copper on no net:
  other v1: 14.55,14.05 15.65,14.05 16.75,14.05 17.85,14.05 18.95,14.05 14.55,15.15 15.65,15.15 16.75,15.15 17.85,15.15 18.95,15.15 14.55,16.25 15.65,16.25 16.75,16.25 17.85,16.25 18.95,16.25 14.55,17.35 15.65,17.35 16.75,17.35 17.85,17.35 18.95,17.35 14.55,18.45 15.65,18.45 16.75,18.45 17.85,18.45 18.95,18.45

## Polygon pours and split planes (outlines as drawn)
GND on Bottom Layer "GND_L02_P001" (solid, pour order 1): 1,35.5 1,6 6,1 14,1 18,5 22,5 29,12 29,35.5 24,40 5.5,40

## Silkscreen, mask and mechanical layers (free items; w line width, h text height)
Mechanical 1:
  the board outline again, w0.254